# Altium PCB GPSDO_FRONT_PCB.PcbDoc
Units mm, origin at the board's own origin, x right, y up, seen from the top; angles counter-clockwise.
Board outline 100 x 100 mm, 2 copper layers (Top Layer, Bottom Layer), stack 1.595 mm thick; 52 components, 34 nets, 202 pads, 199 vias.
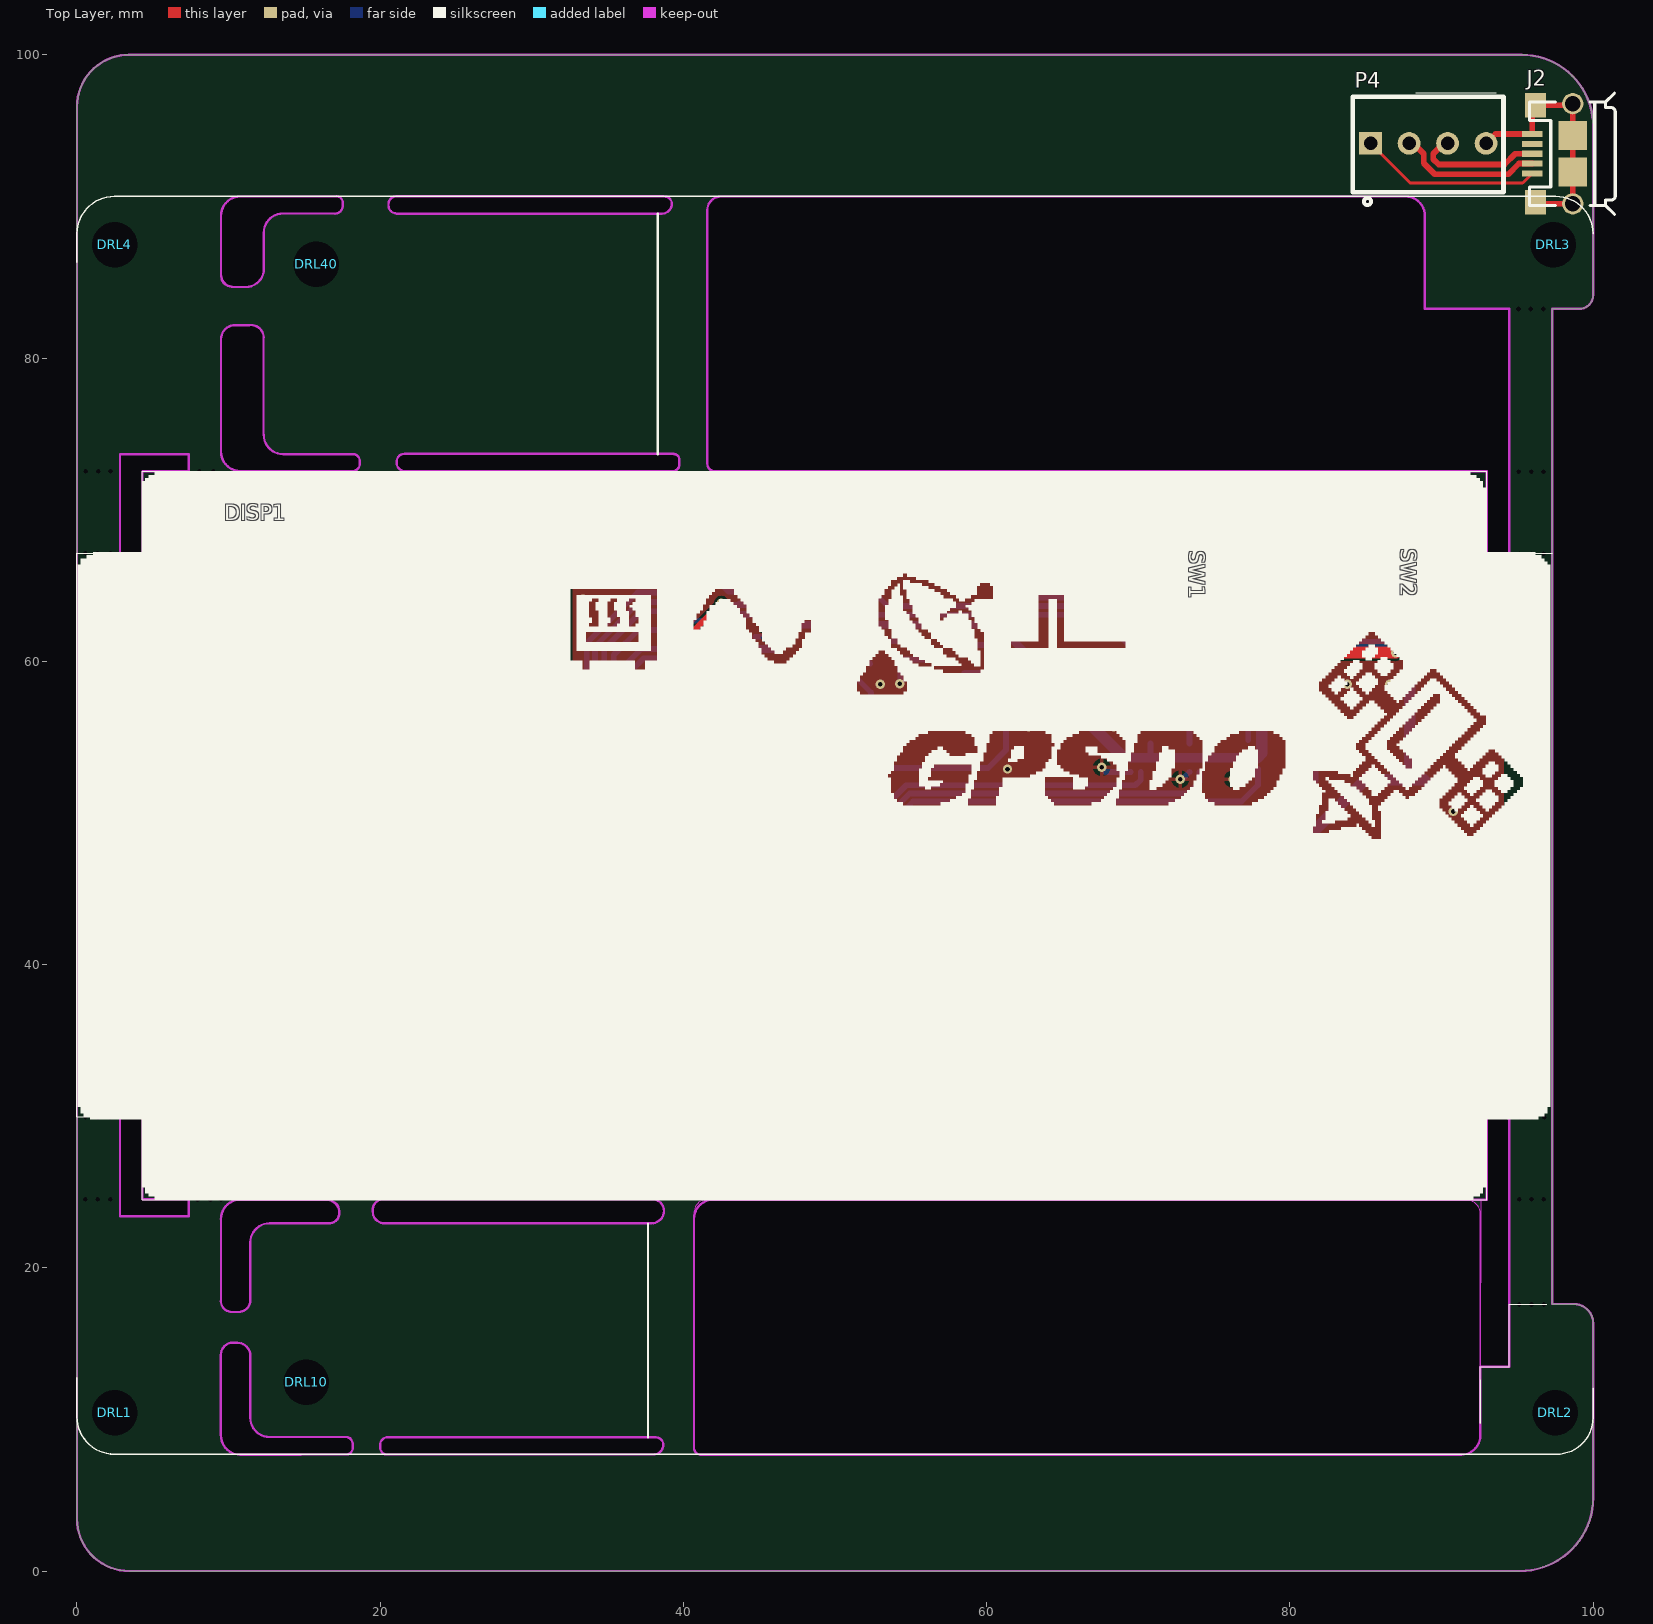
[diagram p0: Top Layer view]
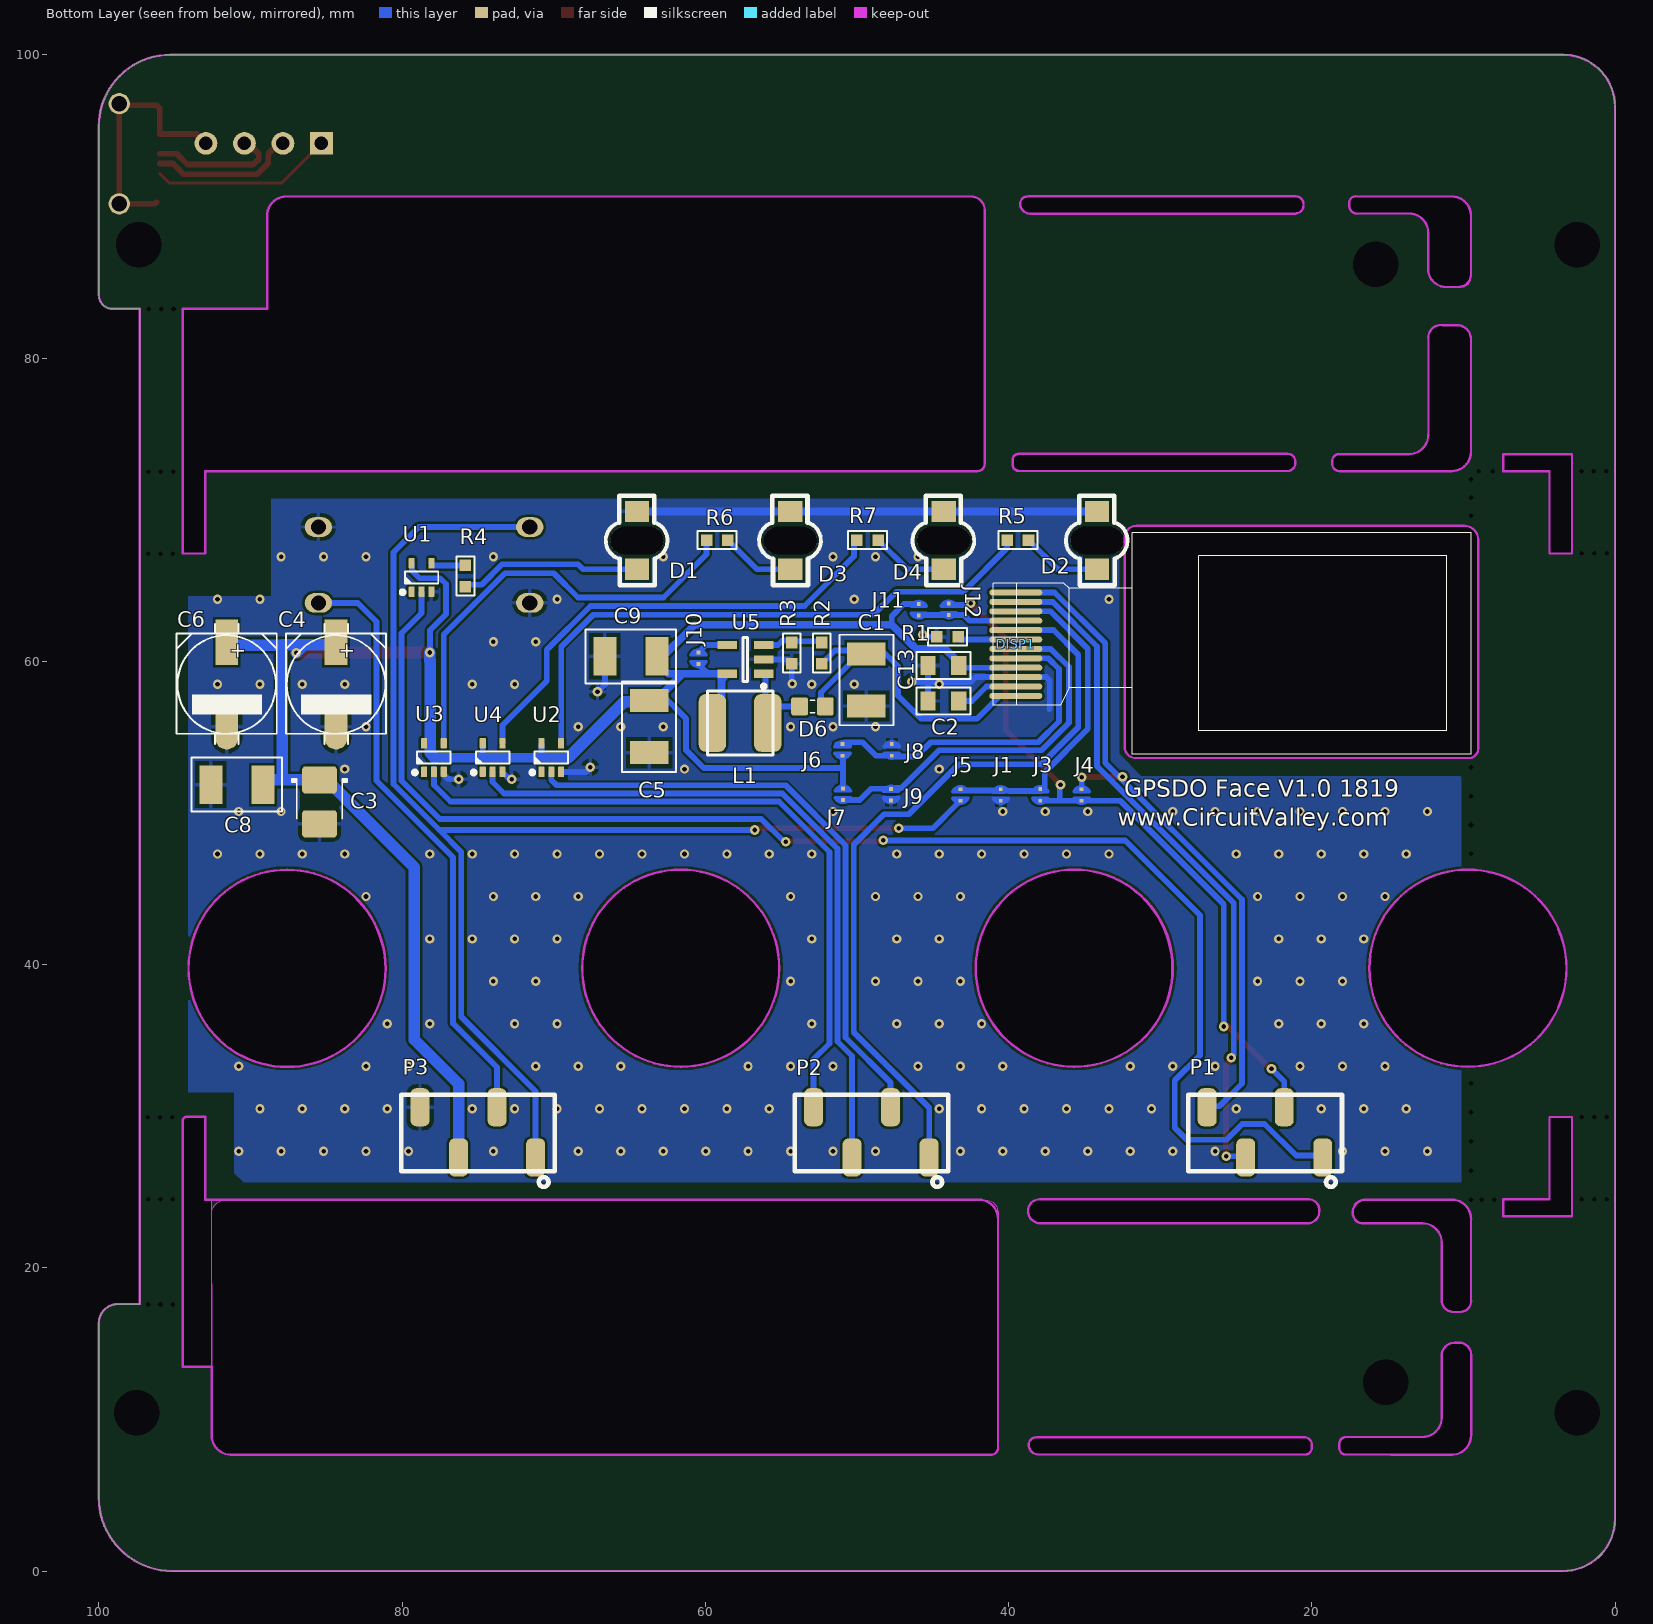
[diagram p1: Bottom Layer view, seen from below]
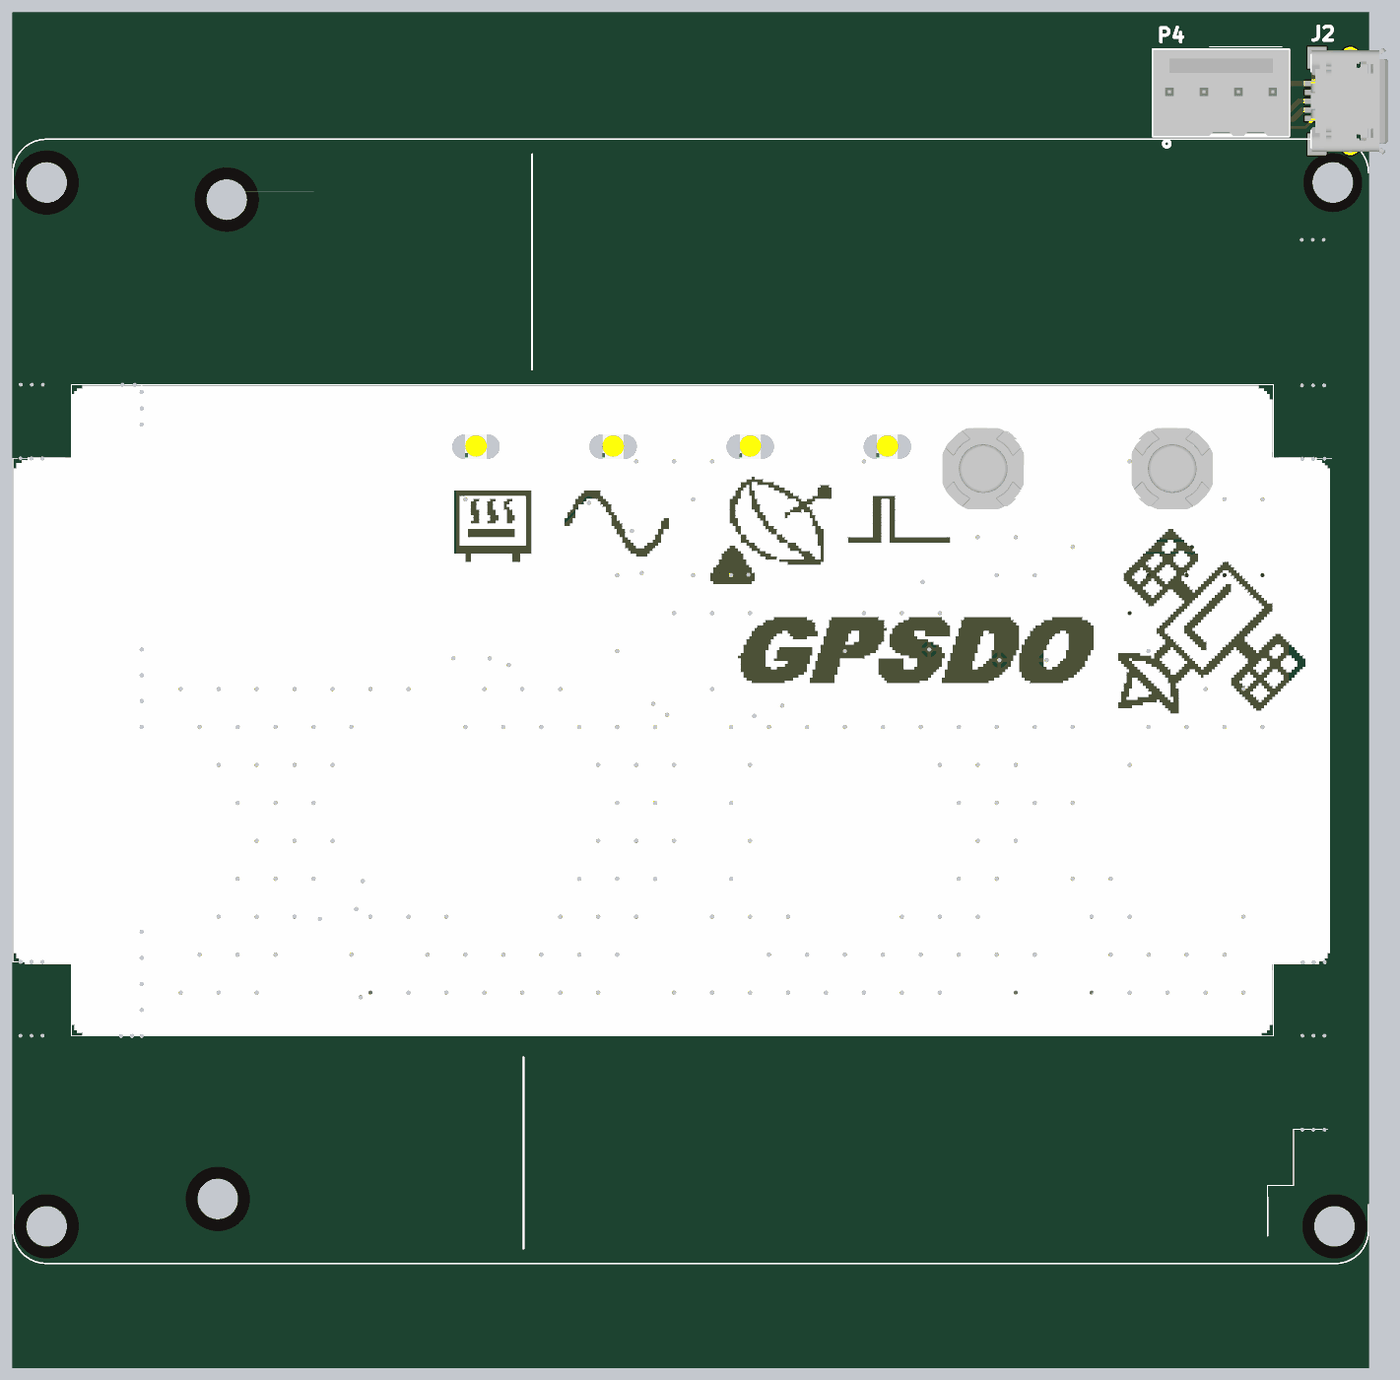
[diagram p2: 3D render of the assembled board from above, using the file's embedded part models]

## Layer stack, top to bottom
Top Solder: solder mask 0.0102, Solder Resist, Dk 3.5
Top Layer: signal copper 0.0356
Dielectric 1: dielectric 1.524, FR-4, Dk 4.8
Bottom Layer: signal copper 0.0356
Bottom Solder: solder mask 0.0102, Solder Resist, Dk 3.5

## Board outline
0,3.439 ccw(c3.439,3.439) 3.439,0 95.17,0 ccw(c95.17,4.83) 100,4.83 100,16.339 ccw(c98.73,16.339) 98.73,17.609 97.307,17.609 97.307,83.242 99.085,83.242 ccw(c99.085,84.157) 100,84.157 100,95.288 ccw(c95.288,95.288) 95.288,100 3.423,100 ccw(c3.423,96.577) 0,96.577
cut-out: 4.318,29.947 2.845,29.947 2.845,23.4 7.366,23.4 7.366,24.517 4.318,24.517
cut-out: 4.318,67.113 2.845,67.113 2.845,73.66 7.366,73.66 7.366,72.542 4.318,72.542
cut-out: 20.371,22.936 cw(c20.371,23.8) 19.507,23.8 cw(c20.199,23.8) 20.199,24.492 37.992,24.492 cw(c37.992,23.774) 38.71,23.774 38.71,23.749 cw(c37.897,23.749) 37.897,22.936
cut-out: 11.43,14.199 ccw(c10.566,14.199) 10.566,15.062 10.389,15.062 ccw(c10.389,14.173) 9.5,14.173 9.5,8.941 ccw(c10.77,8.941) 10.77,7.671 17.653,7.671 ccw(c17.653,8.204) 18.186,8.204 18.186,8.509 ccw(c17.856,8.509) 17.856,8.839 12.7,8.839 cw(c12.7,10.109) 11.43,10.109
cut-out: 11.43,17.856 cw(c10.668,17.856) 10.668,17.094 10.211,17.094 cw(c10.211,17.805) 9.5,17.805 9.5,23.222 cw(c10.77,23.222) 10.77,24.492 16.605,24.492 cw(c16.605,23.8) 17.297,23.8 17.297,23.444 cw(c16.789,23.444) 16.789,22.936 12.7,22.936 ccw(c12.7,21.666) 11.43,21.666
cut-out: 41.58,89.764 cw(c42.469,89.764) 42.469,90.653 87.605,90.653 cw(c87.605,89.357) 88.9,89.357 88.9,83.242 94.463,83.242 94.463,67.113 92.989,67.113 92.989,72.549 42.056,72.549 cw(c42.056,73.025) 41.58,73.025
cut-out: 40.691,8.153 ccw(c41.173,8.153) 41.173,7.671 91.288,7.671 ccw(c91.288,8.941) 92.558,8.941 92.558,23.571 ccw(c91.669,23.571) 91.669,24.46 41.504,24.46 ccw(c41.504,23.647) 40.691,23.647
cut-out: 9.5,81.229 cw(c10.439,81.229) 10.439,82.169 11.379,82.169 cw(c11.379,81.229) 12.319,81.229 12.319,74.93 ccw(c13.589,74.93) 13.589,73.66 15.418,73.66 cw(c15.418,73.635) 15.443,73.635 cw(c15.469,73.635) 15.469,73.66 18.186,73.66 cw(c18.186,73.177) 18.669,73.177 18.669,73.152 cw(c18.066,73.152) 18.066,72.549 10.77,72.549 cw(c10.77,73.819) 9.5,73.819
cut-out: 20.498,8.814 ccw(c20.498,8.306) 19.99,8.306 19.99,8.23 ccw(c20.523,8.23) 20.523,7.696 38.024,7.696 ccw(c38.024,8.331) 38.659,8.331 ccw(c38.176,8.331) 38.176,8.814
cut-out: 21.603,73.673 ccw(c21.603,73.165) 21.095,73.165 21.095,73.088 ccw(c21.628,73.088) 21.628,72.555 39.129,72.555 ccw(c39.129,73.19) 39.764,73.19 ccw(c39.281,73.19) 39.281,73.673
cut-out: 21.057,90.653 ccw(c21.057,90.145) 20.549,90.145 20.549,90.068 ccw(c21.082,90.068) 21.082,89.535 38.583,89.535 ccw(c38.583,90.17) 39.218,90.17 ccw(c38.735,90.17) 38.735,90.653
cut-out: 9.474,88.976 9.474,89.357 cw(c10.77,89.357) 10.77,90.653 17.12,90.653 cw(c17.12,90.246) 17.526,90.246 17.526,90.043 cw(c17.018,90.043) 17.018,89.535 13.589,89.535 ccw(c13.589,88.265) 12.319,88.265 12.319,85.877 cw(c11.125,85.877) 11.125,84.684 10.16,84.684 cw(c10.16,85.344) 9.5,85.344
cut-out: 87.645,46.218 cw(c87.645,39.741) 94.122,39.741 cw(c87.594,39.741) 87.594,33.213 cw(c87.594,39.69) 81.117,39.69 cw(c87.645,39.69)
cut-out: 61.61,46.243 cw(c61.61,39.766) 68.087,39.766 cw(c61.559,39.766) 61.559,33.238 cw(c61.559,39.715) 55.082,39.715 cw(c61.61,39.715)
cut-out: 35.753,46.243 cw(c35.753,39.766) 42.23,39.766 cw(c35.702,39.766) 35.702,33.238 cw(c35.702,39.715) 29.225,39.715 cw(c35.753,39.715)
cut-out: 9.743,46.254 cw(c9.743,39.777) 16.22,39.777 cw(c9.693,39.777) 9.693,33.249 cw(c9.692,39.726) 3.215,39.726 cw(c9.743,39.726)
cut-out: 92.558,13.468 94.463,13.468 94.463,29.699 ccw(c94.209,29.699) 94.209,29.953 92.989,29.953 92.989,24.492 92.583,24.492 92.583,24.494
cut-out: 32.334,68.097 ccw(c31.547,68.148) 31.598,68.936 9.931,68.936 ccw(c9.93,68.048) 9.042,68.047 9.042,54.229 ccw(c9.652,54.229) 9.652,53.619 31.598,53.619 ccw(c31.585,54.369) 32.334,54.381

## Design rules (kind name [scope] priority, off if disabled: settings)
Clearance [All] p1: gap=0.152
DiffPairsRouting [All] p1: maxlimit=0.254 minlimit=0.254 mostfreqgap=0.254 toplayer_minwidth=0.381 toplayer_maxwidth=0.381 toplayer_prefwidth=0.381 bottomlayer_minwidth=0.381 bottomlayer_maxwidth=0.381 bottomlayer_prefwidth=0.381 maxuncoupledlength=12.7
PolygonConnect [All] p1: connectstyle=Relief reliefconductorwidth=0.254 reliefentries=4 polygonreliefangle="90 Angle" airgapwidth=0.254
RoutingVias [All] p1: holewidth=0.305 width=0.635 viastyle="Through Hole" minholewidth=0.305 minwidth=0.635 maxholewidth=12.7 maxwidth=12.7
SolderMaskExpansion [All] p1: expansion=0.102
Width [All] p1: maxlimit=7.62 minlimit=0.152 preferedwidth=0.254
29 further rules are at their usual default settings.

## Classes and differential pairs
component class GPSDO_FRONT: C1 C2 C3 C4 C5 C6 C8 C9 C13 D1 D2 D3 D4 D6 DISP1 J1 J2 J3 J4 J5 J6 J7 J8 J9 J10 J11 J12 L1 P1 P2 P3 P4 R1 R2 R3 R4 R5 R6 R7 SW1 SW2 U1 U2 U3 U4 U5
differential pair USB: +USB_P -USB_N

## Components (designator, comment, footprint, x,y, rotation, side; value= is the part's Value field where it differs from the comment)
C1 "10uf" 1210C-GENERIC 49.378,57.048 r90 bottom
C2 "TBD" 0805C-TBD 45.06,57.379 r180 bottom
C3 "10uf" CAPMP3528X210N 85.446,50.724 r270 bottom
C4 "100uF-25V" PANACAP-D-GENERIC 84.353,58.471 r270 bottom
C5 "10uf" 1210C-GENERIC 63.703,53.975 r90 bottom
C6 "100uF-25V" PANACAP-D-GENERIC 91.567,58.471 r270 bottom
C8 "10uf" 1210C-GENERIC 92.608,51.867 r180 bottom
C9 "10uf" 1210C-GENERIC 66.624,60.325 r180 bottom
C13 "TBD" 0805C-TBD 45.06,59.715 r180 bottom
D1 "KPTL-3216SURCK-01" KPTL-3216SURCK-01 64.508,67.97 r90 bottom
D2 "KPTL-3216SURCK-01" KPTL-3216SURCK-01 34.163,67.97 r90 bottom
D3 "KPTL-3216SURCK-01" KPTL-3216SURCK-01 54.393,67.97 r90 bottom
D4 "KPTL-3216SURCK-01" KPTL-3216SURCK-01 44.278,67.97 r90 bottom
D6 "" Diode_0603 52.934,57.023 r180 bottom
DISP1 "OLED" "OLED QT1107P05C" 27.457,61.17 r0 top locked
DRL1 "MOUNT 2.7x6.2Mask" NO_COPPER_NOMASK_2m75_6m2#1 2.703,10.446 r0 top
DRL2 "MOUNT 2.7x6.2Mask" NO_COPPER_NOMASK_2m75_6m2#2 97.283,10.446 r0 top
DRL3 "MOUNT 2.7x6.2Mask" NO_COPPER_NOMASK_2m75_6m2#3 97.102,87.459 r0 top
DRL4 "MOUNT 2.7x6.2Mask" NO_COPPER_NOMASK_2m75_6m2#4 3.31,87.846 r0 top
DRL10 "MOUNT 2.7x6.2Mask" NO_COPPER_NOMASK_2m75_6m2#1 14.899,12.465 r180 top (schematic designator DRL1)
DRL40 "MOUNT 2.7x6.2Mask" NO_COPPER_NOMASK_2m75_6m2#4 14.953,85.814 r180 top (schematic designator DRL4)
J1 "BYPASS-MINI-CLOSED" BYPASS-MINI-CLOSED#1 40.513,50.317 r90 bottom
J2 "Micro-USB-B" 10118193-0001lfc 98.654,93.472 r90 top
J3 "BYPASS-MINI-CLOSED" BYPASS-MINI-CLOSED#2 37.914,52.049 r270 bottom
J4 "BYPASS-MINI-CLOSED" BYPASS-MINI-CLOSED#3 35.179,50.317 r90 bottom
J5 "BYPASS-MINI-CLOSED" BYPASS-MINI-CLOSED#2 43.18,52.045 r270 bottom
J6 "BYPASS-MINI-CLOSED" BYPASS-MINI-CLOSED#4 50.952,55.016 r270 bottom
J7 "BYPASS-MINI-CLOSED" BYPASS-MINI-CLOSED#5 50.927,50.368 r90 bottom
J8 "BYPASS-MINI-CLOSED" BYPASS-MINI-CLOSED#6 47.701,55.016 r270 bottom
J9 "BYPASS-MINI-CLOSED" BYPASS-MINI-CLOSED#7 47.752,50.343 r90 bottom
J10 "BYPASS-MINI-CLOSED" BYPASS-MINI-CLOSED#8 60.452,61.062 r270 bottom
J11 "BYPASS-MINI-CLOSED" BYPASS-MINI-CLOSED#2 45.923,62.535 r90 bottom
J12 "BYPASS-MINI-CLOSED" BYPASS-MINI-CLOSED#5 43.942,64.287 r270 bottom
L1 "Inductor" IFSC-1515AH-01 57.683,55.931 r180 bottom
P1 "Header 4" "M20-8770446 4PIN" 23.089,28.931 r0 bottom
P2 "Header 4" "M20-8770446 4PIN" 49.047,28.931 r0 bottom
P3 "Header 4" "M20-8770446 4PIN" 75.006,28.931 r0 bottom
P4 "Header 4" 22-23-2041 89.129,94.158 r0 top
R1 "0603R-000" 0603R-GENERIC 44.729,61.62 r180 bottom
R2 "0603R-000" 0603R-GENERIC 52.324,61.239 r270 bottom
R3 "0603R-000" 0603R-GENERIC 54.305,59.842 r90 bottom
R4 "0603R-000" 0603R-GENERIC 75.819,64.922 r90 bottom
R5 "0603R-000" 0603R-GENERIC 38.684,67.996 r0 bottom
R6 "0603R-000" 0603R-GENERIC 58.522,67.996 r0 bottom
R7 "0603R-000" 0603R-GENERIC 48.603,67.996 r0 bottom
SW1 "PushButton" EVQ-11A04R 71.577,66.351 r270 top
SW2 "PushButton" EVQ-11A04R 85.522,66.351 r90 top locked
U1 "74LVC1G17GW" SC70-5 78.715,65.532 r90 bottom
U2 "74LVC1G17GW" SC70-5 70.155,53.645 r90 bottom
U3 "74LVC1G17GW" SC70-5 77.902,53.645 r90 bottom
U4 "74LVC1G17GW" SC70-5 74.028,53.645 r90 bottom
U5 "LT1615ES5" LT-S5-5-TSOT-23_N 57.353,60.122 r0 bottom

## Footprints (in the part's own frame and the unit in brackets; to place one, negate y for a bottom-side part, rotate by r counter-clockwise, add the part's x,y. Pads: shape width x height; smd on the part's side, far side on the other; paste and mask are expansions set on the pad)
22-23-2041 [mm]
  rect 1.5x1.5 hole 0.9: 1(-3.81,0)
  round 1.5 hole 0.9: 2(-1.27,0) 3(1.27,0) 4(3.81,0)
  silkscreen extent -4.98,-4.07 4.95,3.07, body extent -5,-3.25 5,3.1, height 10.68
0603R-GENERIC [mil] "RESISTOR 0603"
  rect 30x30 smd: 1(0,0) 2(55,0)
  silkscreen extent -23,-23 78,23, body extent -4,-15 59,15, height 19
0805C-TBD [mil] "CAPACITOR 0805"
  rect 40x50 smd: 1(-10,0) 2(70,0)
  silkscreen extent -40,-35 100,35, body extent -11,-25 70,25, height 26
1210C-GENERIC [mil]
  rect 60x100 smd: 1(0,0) 2(135,0)
  silkscreen extent -50,-70 185,70, body extent -10,-50 145,50, height 46
10118193-0001lfc [mm]
  rect 0.4x1.35 smd: 1(-1.3,2.675) 2(-0.65,2.675) 3(0,2.675) 4(0.65,2.675) 5(1.3,2.675)
  round 1.4 hole 1: 6(-3.3,0) 9(3.3,0)
  rect 1.6x1.4 smd: 6(-3.2,2.45) 9(3.2,2.45)
  rect 1.9x1.9 smd: 7(-1.2,0) 8(1.2,0)
  silkscreen extent -4,-2.8 4,2.85, body extent -3.93,-2.76 3.93,2.9, height 2.81
BYPASS-MINI-CLOSED#1 [mil] "SOLDERDOT BYPASS"
  rect 10x10 smd paste-300: 1(19,0)
  rect 10x10 smd paste-30: 2(49,0)
  Top Layer region: 25,18 23,18 13,8 13,-9 22,-18 25,-18
  Top Layer region: 43,18 45,18 55,8 55,-9 46,-18 43,-18
  Top Layer lines w8: 25.83,-20.43 cw(c34,0) 25.83,20.43 25.83,-20.43 ; 42.17,-20.43 ccw(c34,0) 43.67,-19.76 ccw(c34,0) 47,-17.75 ccw(c34,0) 42.17,20.43 42.17,6 42.17,0 42.17,-20.43
  body extent 15,-20 55,20, height 25
BYPASS-MINI-CLOSED#2 [mil] "SOLDERDOT BYPASS"
  rect 10x10 smd paste-300: 1(19,0)
  rect 10x10 smd paste-30: 2(49,0)
  Top Layer region: 25,18 23,18 13,8 13,-9 22,-18 25,-18
  Top Layer region: 43,18 45,18 55,8 55,-9 46,-18 43,-18
  Top Layer lines w8: 42.17,20.43 cw(c34,0) 48,16.97 cw(c34,0) 49.17,15.93 cw(c34,0) 42.17,-20.43 42.17,0 42.17,20.43 ; 25.83,20.43 ccw(c34,0) 15.28,11.56 ccw(c34,0) 12.87,6.13 ccw(c34,0) 19,-16.09 ccw(c34,0) 23.67,-19.42 ccw(c34,0) 25.83,-20.43 25.83,0 25.83,20.43
  body extent 15,-20 55,20, height 25
BYPASS-MINI-CLOSED#3 [mil] "SOLDERDOT BYPASS"
  rect 10x10 smd paste-300: 1(19,0)
  rect 10x10 smd paste-30: 2(49,0)
  Top Layer region: 25,18 23,18 13,8 13,-9 22,-18 25,-18
  Top Layer region: 43,18 45,18 55,8 55,-9 46,-18 43,-18
  Top Layer lines w8: 25.83,-20.43 cw(c34,0) 19,-16.09 cw(c34,0) 19,16.09 cw(c34,0) 25.83,20.43 25.83,0 25.83,-20.43 ; 42.17,-20.43 ccw(c34,0) 56,0 ccw(c34,0) 42.17,20.43 42.17,0 42.17,-20.43
  body extent 15,-20 55,20, height 25
BYPASS-MINI-CLOSED#4 [mil] "SOLDERDOT BYPASS"
  rect 10x10 smd paste-300: 1(19,0)
  rect 10x10 smd paste-30: 2(49,0)
  Top Layer region: 25,18 23,18 13,8 13,-9 22,-18 25,-18
  Top Layer region: 43,18 45,18 55,8 55,-9 46,-18 43,-18
  Top Layer lines w8: 42.17,20.43 cw(c34,0) 56,0 cw(c34,0) 42.17,-20.43 42.17,0 42.17,20.43 ; 25.83,20.43 ccw(c34,0) 21,17.75 ccw(c34,0) 20,16.97 ccw(c34,0) 19,16.09 ccw(c34,0) 14,9.17 ccw(c34,0) 12.01,-0.52 ccw(c34,0) 19,-16.09 ccw(c34,0) 25.83,-20.43 25.83,-16.09 25.83,0 25.83,20.43
  body extent 15,-20 55,20, height 25
BYPASS-MINI-CLOSED#5 [mil] "SOLDERDOT BYPASS"
  rect 10x10 smd paste-300: 1(19,0)
  rect 10x10 smd paste-30: 2(49,0)
  Top Layer region: 25,18 23,18 13,8 13,-9 22,-18 25,-18
  Top Layer region: 43,18 45,18 55,8 55,-9 46,-18 43,-18
  Top Layer lines w8: 25.83,-20.43 cw(c34,0) 19,-16.09 cw(c34,0) 13.78,-8.67 cw(c34,0) 17.55,14.6 cw(c34,0) 19.57,16.61 cw(c34,0) 19.72,16.73 cw(c34,0) 25.83,20.43 25.83,0 25.83,-4.9 25.83,-20.43 ; 42.17,-20.43 ccw(c34,0) 56,0 ccw(c34,0) 42.17,20.43 42.17,0 42.17,-20.43
  body extent 15,-20 55,20, height 25
BYPASS-MINI-CLOSED#6 [mil] "SOLDERDOT BYPASS"
  rect 10x10 smd paste-300: 1(19,0)
  rect 10x10 smd paste-30: 2(49,0)
  Top Layer region: 25,18 23,18 13,8 13,-9 22,-18 25,-18
  Top Layer region: 43,18 45,18 55,8 55,-9 46,-18 43,-18
  Top Layer lines w8: 42.17,20.43 cw(c34,0) 47,17.75 cw(c34,0) 49,16.09 cw(c34,0) 51,13.96 cw(c34,0) 54,9.17 cw(c34,0) 54.22,-8.67 cw(c34,0) 54,-9.17 cw(c34,0) 49,-16.09 cw(c34,0) 47,-17.75 cw(c34,0) 42.17,-20.43 42.17,0 42.17,16.09 42.17,20.43 ; 25.83,20.43 ccw(c34,0) 25.83,-20.43 25.83,20.43
  body extent 15,-20 55,20, height 25
BYPASS-MINI-CLOSED#7 [mil] "SOLDERDOT BYPASS"
  rect 10x10 smd paste-300: 1(19,0)
  rect 10x10 smd paste-30: 2(49,0)
  Top Layer region: 25,18 23,18 13,8 13,-9 22,-18 25,-18
  Top Layer region: 43,18 45,18 55,8 55,-9 46,-18 43,-18
  Top Layer lines w8: 25.83,-20.43 cw(c34,0) 25.83,20.43 25.83,-20.43 ; 42.17,-20.43 ccw(c34,0) 51.03,-13.93 ccw(c34,0) 51.28,-13.61 ccw(c34,0) 55.13,6.13 ccw(c34,0) 51.03,13.93 ccw(c34,0) 49,16.09 ccw(c34,0) 42.17,20.43 42.17,0 42.17,-7.15 42.17,-13.93 42.17,-20.43
  body extent 15,-20 55,20, height 25
BYPASS-MINI-CLOSED#8 [mil] "SOLDERDOT BYPASS"
  rect 10x10 smd paste-300: 1(19,0)
  rect 10x10 smd paste-30: 2(49,0)
  Top Layer region: 25,18 23,18 13,8 13,-9 22,-18 25,-18
  Top Layer region: 43,18 45,18 55,8 55,-9 46,-18 43,-18
  Top Layer lines w8: 42.17,20.43 cw(c34,0) 55.13,6.13 cw(c34,0) 42.17,-20.43 42.17,0 42.17,20.43 ; 25.83,20.43 ccw(c34,0) 12.87,6.13 ccw(c34,0) 25.83,-20.43 25.83,0 25.83,20.43
  body extent 15,-20 55,20, height 25
CAPMP3528X210N [mm] "Molded body capacitor, Body 3.5x2.8mm, 1210, IPC Nominal settings"
  round 0.254 on Mech14: 0(0,0)
  rrect25% 1.8x2.3 smd: 1(-1.45,0) 2(1.45,0)
  Top Layer pour cut-out: -0.508,1.27 0.508,1.27 0.508,-1.27 -0.508,-1.27
  silkscreen extent -1.5,-1.8 1.1,1.8, body extent -1.75,-1.4 1.75,1.4, height 2.1
Diode_0603 [mm] "SD0603S040S0R2"
  round 0.254 on Mech14: 0(0,0)
  rrect25% 1.1x1.2 smd: 1(-0.85,0) 2(0.85,0)
  Top Layer pour cut-out: -0.4,0.6 0.4,0.6 0.4,-0.6 -0.4,-0.6
  silkscreen extent -0.15,-0.41 0.15,0.41, body extent -0.82,-0.43 0.88,0.37, height 0.57
EVQ-11A04R [mm] "Panasonic EVQ-11"
  oval 1.3x1.8 hole 1: 1(-2.5,0) 2(2.5,0)
  body extent -3,-3 3,3, height 5.59
IFSC-1515AH-01 [mm] "Vishay Dale Low Profile, High Current Inductors"
  rrect50% 1.8x3.8 smd: 1(-1.85,0) 2(1.8,0)
  silkscreen extent -2.16,-2.11 2.16,2.11, body extent -1.97,-1.95 1.98,2, height 1.65
KPTL-3216SURCK-01 [mm]
  oval 1.8x3.5 hole 1.8 slot 3.5 at 90 deg unplated: 3(0,0)
  rect 1.4x1.6 smd: A(-1.905,0) K(1.905,0)
  silkscreen extent -2.95,-2.01 2.95,2.06, body extent -1.55,-0.8 1.65,0.8, height 0.26
LT-S5-5-TSOT-23_N [mm] "SOT23, 5-Leads, Body 2.90x1.63mm, Pitch 0.95mm, IPC Medium Density"
  rect 1.3x0.55 smd: 1(-1.2,0.95) 2(-1.2,0) 3(-1.2,-0.95) 4(1.2,-0.95) 5(1.2,0.95)
  silkscreen extent -1.32,-1.45 0.15,1.9, body extent -0.87,-1.45 0.87,1.45, height 1
"M20-8770446 4PIN" [mm] "harwin M20-8770446 4PIN"
  rrect60% 1.25x2.51 smd: 1(-3.81,1.655) 2(-1.27,-1.655) 3(1.27,1.655) 4(3.81,-1.655)
  silkscreen extent -5.08,-2.49 5.05,3.59, body extent -5.08,-2.49 5.08,2.59, height 9.94
NO_COPPER_NOMASK_2m75_6m2#1 [mm]
  round 5 on Keep-Out: 0(-0.214,0)
  round 2.75 hole 3 unplated mask+1: D2m7(-0.214,0)
NO_COPPER_NOMASK_2m75_6m2#2 [mm]
  round 5 on Keep-Out: 0(0.206,0)
  round 2.75 hole 3 unplated mask+1: D2m7(0.206,0)
NO_COPPER_NOMASK_2m75_6m2#3 [mm]
  round 3.4 on Keep-Out: 0(0.262,0)
  round 2.75 hole 3 unplated mask+0.8: D2m7(0.262,0)
NO_COPPER_NOMASK_2m75_6m2#4 [mm]
  round 5 on Keep-Out: 0(-0.821,-0.386)
  round 2.75 hole 3 unplated mask+1: D2m7(-0.821,-0.386)
"OLED QT1107P05C" [mm] "OLED QT1107P05C  0.73inch 88x128 , flat mount"
  oval 3.5x0.4 smd far side: 1(12.065,-3.454) 2(12.065,-2.834) 3(12.065,-2.214) 4(12.065,-1.594) 5(12.065,-0.974) 6(12.065,-0.354) 7(12.065,0.266) 8(12.065,0.886) 9(12.065,1.506) 10(12.065,2.126) 11(12.065,2.746) 12(12.065,3.366)
  body extent -17.96,-7.29 13.54,7.32, height 0.1
PANACAP-D-GENERIC [mm]
  rect 3x1.5 smd: +(-2.794,0)
  oval 3x1.5 smd: -(2.794,0)
  silkscreen extent -4,-3.3 3.93,3.3, body extent -3.5,-3.3 3.5,3.3, height 5.4
SC70-5 [mm]
  round 0.254 on Mech14: 0(0,0)
  rrect25% 0.7x0.4 smd: 1(-0.94,0.65) 2(-0.94,0) 3(-0.94,-0.65) 4(0.94,-0.65) 5(0.94,0.65)
  silkscreen extent -1.1,-1.1 0.4,1.38, body extent -1.06,-1 1.04,1, height 0.95

## Part data
C1 C5 C8 C9: library part 1210C-2u2-35V, "GENERIC CAPACITOR NON POLARISED 1210"
C2 C13: library part 0805C-TBD, "CAPACITOR 0805 CERAMIC VALUE TO BE DETERMINED"
C3: library part CAPT_47u_1210_6V3, "Capacitor SMD Tantalum 47uF 20% 6.3V 1210"
C4 C6: library part PANACAP-100UF-16V-FK, "GENERIC CAPACITOR POLARISED"
D6: library part Schottky_diode
DISP1: library part "OLED QT1107P05C"
DRL1 DRL2 DRL3 DRL4 DRL10 DRL40: library part DRILL_2.7x6.2Mask_NOCOPPER
J1 J3 J4 J5 J6 J7 J8 J9 J10 J11 J12: "SOLDERDOT BYPASS"
L1: library part inductor_smd
P1 P2 P3 P4: "Header, 4-Pin"
R1 R2 R3 R4 R5 R6 R7: "GENERIC RESISTOR 0603"
U1 U2 U3 U4: library part 74LVC1G17GW-Q100
U5: "Micropower Step-Up DC/DC Converter, 5-pin SOT23 (S5-5), -40 to 85 degC"

## Free pads (board coordinates)
  round 0 hole 0.305 unplated: 0(2.184,24.511) 0(2.184,29.947) 0(2.184,67.113) 0(2.21,72.542) 0(9.5,24.486) 0(9.5,30.258) 0(9.5,32.182) 0(9.5,51.105) 0(9.5,70.79) 0(96.698,83.236) 0(96.723,72.492) 0(96.749,17.577) 0(96.749,24.511) 0(96.749,67.081) 0(96.774,29.921) 1(0.559,24.511) 1(0.559,29.947) 1(0.559,67.113) 1(0.584,72.542) 1(7.976,24.486) 1(8.077,72.542) 1(9.5,28.334) 1(9.5,47.295) 1(9.5,49.2) 1(9.5,69.596) 1(9.5,72.009) 1(95.072,83.236) 1(95.098,72.492) 1(95.123,17.577) 1(95.123,24.511) 1(95.123,67.081) 1(95.148,29.921) 2(1.372,24.511) 2(1.372,29.947) 2(1.372,67.113) 2(1.397,72.542) 2(8.788,24.486) 2(8.992,72.542) 2(9.5,26.41) 2(9.5,53.01) 2(95.885,83.236) 2(95.91,72.492) 2(95.936,17.577) 2(95.936,24.511) 2(95.936,67.081) 2(95.961,29.921)

## Via types
v1: diameter 0.61, hole 0.305, Top Layer to Bottom Layer, tented both sides, 178 vias
v2: diameter 0.635, hole 0.305, Top Layer to Bottom Layer, tented both sides, 21 vias

## Nets (pads, with @x,y where several pads share a name; then routed paths per layer and width w, separated by ;. In a path a pad name is that pad's centre, name@x,y a point inside that pad or via, vN(x,y) a via of type N, cw(c..) or ccw(c..) an arc to the next point about the centre after c; other vN are vias at no path point)
3V3: C3.1 C4.+ C5.2 C6.+ C8.2 C9.2 C13.2 DISP1.4 J6.2 J7.2 J10.2 J11.2 L1.1 P3.3 U1.5 U2.5 U3.5 U4.5 U5.5 | length 149.7
  Top Layer w0.762: v2(78.181,60.579) 86.944,60.579 v2(86.97,60.554)
  Bottom Layer w0.381: DISP1.4 43.141,59.575 C13.2 ; J11.2 46.332,63.779 46.888,63.779 47.701,62.967 47.701,62.408 ; J7.2 50.927,51.791 J6.2@50.927,53.746 ; 50.927,52.959 60.096,52.959 61.265,54.127 61.265,56.21 C5.2@62.865,57.81 ; 59.807,59.172 60.296,59.661 J10.2 ; 70.764,53.645 70.805,53.685 U2.5 ; 74.651,53.645 74.678,53.672 U4.5 ; 78.156,60.02 78.156,62.052 77.102,63.106 77.102,65.087 77.495,65.481 78.842,65.481 79.365,66.004 U1.5
  Bottom Layer w0.508: C13.2 43.282,59.919 44.171,60.808 46.101,60.808 47.701,62.408 60.706,62.408 63.195,59.919 62.448,59.172 61.504,59.172 ; L1.1@58.93,56.134 58.93,58.795 U5.5 59.807,59.172 61.504,59.172 ; C5.2@62.865,57.81 61.504,59.172
  Bottom Layer w0.635: 69.037,53.645 70.764,53.645 74.651,53.645 77.851,53.645
  Bottom Layer w0.762: C5.2@62.713,57.328 65.354,57.328 69.037,53.645 ; P3.3 76.276,32.131 79.197,35.052 79.197,46.406 C3.1@85.205,52.414 ; 77.851,53.645 78.156,53.95 78.156,60.02 78.181,60.046 v2(78.181,60.579) ; C4.+ 84.531,61.087 86.614,61.087 ; C3.1 87.909,52.174 ; v2(86.97,60.554) 86.614,60.909 86.614,61.087 ; C8.2 88.872,52.174 87.909,52.174 ; C6.+@91.592,61.163 91.491,61.062 87.935,61.062 87.909,61.087 ; 86.614,61.087 87.909,61.087 ; 87.909,52.174 87.909,61.087
A0: DISP1.10 J1.2 J3.1 J5.1 | length 22.1
  Bottom Layer w0.381: DISP1.10 37.235,63.295 34.773,60.833 34.773,55.524 37.62,52.677 37.62,51.661 37.833,51.448 38.407,51.448 39.982,51.448 39.991,51.456 40.269,51.456 40.277,51.448 41.02,51.448 41.054,51.482 43.003,51.482 43.012,51.473 43.536,51.473
ANT: P2.3 U4.2 | length 46
  Bottom Layer w0.381: P2.3 50.317,33.96 51.283,34.925 51.283,47.643 54.922,51.283 73.279,51.283 74.041,52.045 74.028,52.057 U4.2
GND: C1.1 C2.1 C3.2 C4.- C5.1 C6.- C8.1 C9.1 C13.1 D1.K D2.K D3.K D4.K DISP1.3 J1.1 J8.1 J9.1 P3.4 R1.1 R3.1 SW1.2 SW2.2 U1.3 U2.3 U3.3 U4.3 U5.2 | length 54.8
  Bottom Layer w0.381: 37.313,56.845 37.287,56.871 37.287,58.725 37.518,58.955 DISP1.3 42.188,58.955 42.52,58.623 45.263,58.623 ; R1.1 45.542,61.62 v2(45.669,61.747) ; C2.1@45.288,57.379 45.314,57.404 45.314,58.623 ; C13.1 45.314,58.623 ; v2(46.38,58.649) 46.355,58.623 45.314,58.623 ; v2(54.254,58.522) 54.305,58.572 R3.1 ; R3.1@54.305,59.919 54.508,60.122 U5.2 ; C9.1 66.624,58.471 v2(67.107,57.988) ; v2(67.589,53.01) 67.589,52.959 67.844,52.705 U2.3 ; v2(72.771,52.222) 72.896,52.222 U4.3 ; v2(76.251,52.222) 76.769,52.222 ccw(c76.769,52.705) U3.3
  Bottom Layer w0.508: D2.K D4.K D3.K D1.K
  other v1: 12.377,27.688 15.177,27.688 17.977,27.688 26.377,27.688 29.177,27.688 31.977,27.688 34.777,27.688 37.577,27.688 40.377,27.688 43.177,27.688 48.777,27.688 51.577,27.688 54.377,27.688 57.177,27.688 59.977,27.688 62.777,27.688 65.577,27.688 68.377,27.688 73.977,27.688 79.577,27.688 82.377,27.688 85.177,27.688 87.977,27.688 90.777,27.688 13.777,30.488 16.577,30.488 19.377,30.488 24.977,30.488 30.577,30.488 33.377,30.488 36.177,30.488 38.977,30.488 41.777,30.488 44.577,30.488 55.777,30.488 58.577,30.488 61.377,30.488 64.177,30.488 66.977,30.488 69.777,30.488 72.577,30.488 75.377,30.488 80.977,30.488 83.777,30.488 86.577,30.488 89.377,30.488 15.177,33.288 17.977,33.288 20.777,33.288 26.377,33.288 29.177,33.288 31.977,33.288 40.377,33.288 43.177,33.288 45.977,33.288 51.577,33.288 54.377,33.288 57.177,33.288 65.577,33.288 68.377,33.288 71.177,33.288 79.577,33.288 82.377,33.288 90.777,33.288 16.577,36.088 19.377,36.088 22.177,36.088 41.777,36.088 44.577,36.088 47.377,36.088 52.977,36.088 69.777,36.088 72.577,36.088 78.177,36.088 80.977,36.088 17.977,38.888 20.777,38.888 23.577,38.888 43.177,38.888 45.977,38.888 48.777,38.888 54.377,38.888 71.177,38.888 73.977,38.888 16.577,41.688 19.377,41.688 22.177,41.688 44.577,41.688 47.377,41.688 52.977,41.688 69.777,41.688 72.577,41.688 75.377,41.688 78.177,41.688 15.177,44.488 17.977,44.488 20.777,44.488 23.577,44.488 43.177,44.488 45.977,44.488 48.777,44.488 54.377,44.488 68.377,44.488 71.177,44.488 73.977,44.488 82.377,44.488 13.777,47.288 16.577,47.288 19.377,47.288 22.177,47.288 24.977,47.288 33.377,47.288 36.177,47.288 38.977,47.288 41.777,47.288 44.577,47.288 47.377,47.288 52.977,47.288 55.777,47.288 58.577,47.288 61.377,47.288 64.177,47.288 66.977,47.288 69.777,47.288 72.577,47.288 75.377,47.288 78.177,47.288 83.777,47.288 86.577,47.288 89.377,47.288 92.177,47.288 12.377,50.088 15.177,50.088 17.977,50.088 20.777,50.088 23.577,50.088 26.377,50.088 29.177,50.088 34.777,50.088 37.577,50.088 40.377,50.088 51.577,50.088 87.977,50.088 90.777,50.088 44.577,52.888 61.377,52.888 83.777,52.888 48.777,55.688 51.577,55.688 54.377,55.688 62.777,55.688 65.577,55.688 68.377,55.688 82.377,55.688 44.577,58.488 50.177,58.488 52.977,58.488 72.577,58.488 75.377,58.488 83.777,58.488 86.577,58.488 89.377,58.488 92.177,58.488 71.177,61.288 73.977,61.288 33.377,64.088 50.177,64.088 69.777,64.088 89.377,64.088 92.177,64.088 45.977,66.888 48.777,66.888 51.577,66.888 62.777,66.888 73.977,66.888 82.377,66.888 85.177,66.888 87.977,66.888
IM0: DISP1.5 J6.1 J8.2 | length 23.1
  Bottom Layer w0.381: DISP1.5 37.386,60.195 36.678,59.487 36.678,56.032 38.049,54.661 45.136,54.661 46.076,53.721 47.347,53.721 47.65,53.721 J8.2 48.11,53.772 48.743,53.772 49.632,54.661 50.72,54.661 50.825,54.661 J6.1 ; 50.502,54.483 51.31,54.483 51.336,54.508
IM1: DISP1.6 J7.1 J9.2 | length 24.3
  Bottom Layer w0.381: DISP1.6 37.219,60.815 36.017,59.614 36.017,55.938 37.828,54.127 44.592,54.127 47.074,51.645 47.406,51.645 ; J9.2 48.161,51.587 49.073,51.587 49.809,50.851 50.518,50.851 J7.1
KEY1: J5.2 P3.1 SW1.1 | length 88.6
  Top Layer w0.381: v2(47.242,48.994) 56.517,48.994 56.642,48.87 v2(56.744,48.87)
  Bottom Layer w0.381: J5.2 43.336,50.644 44.986,48.994 v2(47.242,48.994) ; v2(56.744,48.87) 77.539,48.87 ; P3.1 71.196,31.648 76.098,36.551 76.098,47.429 77.539,48.87 ; SW1.1 78.901,68.851 80.569,67.183 80.569,51.9 77.539,48.87
KEY2: P3.2 SW2.1 | length 39.7
  Bottom Layer w0.381: P3.2 73.736,33.223 76.632,36.119 76.632,47.066 81.686,52.121 81.686,62.611 82.927,63.851 SW2.1
M10: P2.4 U3.2 | length 46.3
  Bottom Layer w0.381: P2.4 52.857,33.757 51.816,34.798 51.816,47.422 55.143,50.749 76.81,50.749 77.902,51.841 U3.2@77.902,52.908
NetC2_2: C2.2 DISP1.2 | length 4.1
  Bottom Layer w0.381: DISP1.2 41.461,58.335 42.418,57.379 C2.2@43.256,57.379
NetD1_A: D1.A R4.1 | length 12.1
  Bottom Layer w0.381: D1.A 68.072,66.065 68.402,66.396 73.406,66.396 74.752,65.049 75.692,65.049 R4.1
NetD2_A: D2.A R5.1 | length 5.3
  Bottom Layer w0.381: D2.A 36.754,66.065 R5.1
NetD3_A: D3.A R6.1 | length 4.9
  Bottom Layer w0.381: D3.A 56.591,66.065 R6.1
NetD4_A: D4.A R7.1 | length 5.1
  Bottom Layer w0.381: D4.A 46.672,66.065 R7.1
NetD6_1: D6.1 L1.2 U5.1 | length 5.1
  Bottom Layer w0.381: D6.1@54.063,57.023 55.905,57.023 55.982,57.099 L1.2@56.03,57.051 ; L1.2@56.03,56.134 L1.2@56.03,57.051 ; U5.1 56.03,59.049 L1.2@56.03,57.051
NetDISP1_7: DISP1.7 R1.2 | length 3.7
  Bottom Layer w0.381: DISP1.7 R1.2@43.213,61.435
NetJ10_1: J10.1 U5.4 | length 2.1
  Bottom Layer w0.381: U5.4 59.959,61.072 60.296,60.735 J10.1
NetR2_1: R2.1 R3.2 U5.3 | length 4
  Bottom Layer w0.381: R2.1@52.324,61.316 54.305,61.316 54.356,61.366 54.915,61.366 55.209,61.072 U5.3
NetR4_2: R4.2 U1.4 | length 2.3
  Bottom Layer w0.381: R4.2 77.912,66.319 U1.4
NetR5_2: R5.2 U2.4 | length 39
  Bottom Layer w0.381: R5.2 40.081,67.488 42.977,64.592 47.396,64.592 48.92,63.068 67.394,63.068 69.505,60.957 U2.4
NetR6_2: R6.2 U3.4 | length 28.7
  Bottom Layer w0.381: R6.2@59.919,67.92 59.919,67.056 62.763,64.211 68.402,64.211 70.002,65.811 73.203,65.811 77.252,61.762 U3.4@77.252,54.788
NetR7_2: R7.2 U4.4 | length 31.2
  Bottom Layer w0.381: R7.2@50.19,67.894 50.19,66.929 53.467,63.652 67.564,63.652 70.46,60.757 70.46,58.699 73.378,55.781 U4.4
ORST: DISP1.9 J11.1 J12.2 | length 6.6
  Bottom Layer w0.381: DISP1.9 42.57,62.675 42.938,63.043 43.533,63.043 J12.2 44.351,63.043 45.492,63.043 J11.1@45.956,63.043
OSC: P2.2 U2.2 | length 40.2
  Bottom Layer w0.381: P2.2 47.777,32.207 50.749,35.179 50.749,47.864 54.702,51.816 69.799,51.816 70.155,52.172 U2.2
PPS: P1.1 U1.2 | length 95.9
  Top Layer w0.381: v2(48.26,48.184) 48.311,48.133 54.661,48.133 v2(54.686,48.108)
  Bottom Layer w0.381: P1.1@18.898,27.403 21.027,27.403 23.114,29.489 24.587,29.489 25.629,28.448 28.245,28.448 29.032,29.235 29.032,32.36 27.381,34.011 27.381,43.256 32.309,48.184 v2(48.26,48.184) ; v2(54.686,48.108) 54.813,48.108 56.312,49.606 77.521,49.606 80.035,52.121 80.035,61.849 78.715,63.17 U1.2
S\S\: DISP1.8 P2.1 | length 50.3
  Bottom Layer w0.381: DISP1.8 37.036,62.055 35.408,60.427 35.408,55.644 37.838,53.213 43.282,53.213 46.584,49.911 48.209,49.911 50.216,47.904 50.216,35.535 45.237,30.556 P2.1
SCK/SCL: DISP1.11 P1.3 | length 46.1
  Top Layer w0.381: v2(25.324,33.858) 25.324,33.731 25.654,33.401 25.654,27.508 25.502,27.356 v2(25.654,27.356)
  Bottom Layer w0.381: P1.3@23.978,27.403 24.024,27.356 v2(25.654,27.356) ; v2(25.324,33.858) 25.146,34.036 25.146,44.061 34.163,53.078 34.163,60.978 37.092,63.906 39.514,63.906 DISP1.11
SDI/SDA: J3.2 J4.1 J12.1 P1.2 | length 46.7
  Top Layer w0.381: v2(22.657,33.122) 22.733,33.122 25.527,35.916 v2(25.806,35.916) ; v2(36.576,51.867) 40.183,55.474 40.183,61.519 v2(42.494,63.83)
  Bottom Layer w0.381: P1.2 21.819,32.283 v2(22.657,33.122) ; v2(25.806,35.916) 25.806,43.967 32.639,50.8 34.77,50.8 J4.1 35.588,50.8 36.627,50.8 ; v2(36.576,51.867) 36.627,51.816 36.627,50.8 ; J3.2 37.909,50.8 37.509,50.8 36.627,50.8 ; v2(42.494,63.83) 42.621,63.703 43.458,63.703 43.485,63.703
SDO: DISP1.12 J4.2 P1.4 | length 46.5
  Top Layer w0.381: v2(32.487,52.375) 35.154,52.375 v2(35.179,52.349)
  Bottom Layer w0.381: P1.4 26.826,30.658 26.111,30.658 24.613,32.156 24.613,44.282 33.63,53.299 33.63,61.199 36.966,64.535 DISP1.12 ; J4.2 35.179,51.74 v2(35.179,52.349)
USB_N: J2.2 P4.2 | length 9.6
  Top Layer w0.381: P4.2 88.138,94.158 88.824,93.472 88.824,92.853 89.551,92.126 94.417,92.126 95.113,92.822 J2.2
USB_P: J2.3 P4.3 | length 8.5
  Top Layer w0.381: P4.3 90.145,94.158 89.459,93.472 89.459,93.116 89.814,92.761 94.154,92.761 94.865,93.472 J2.3
USBGND: J2.5 J2.6 J2.7 J2.8 J2.9 P4.4 | length 16.9
  Top Layer w0.381: P4.4 93.553,94.772 J2.5 95.979,96.447 96.204,96.672 98.554,96.672 98.654,96.772 J2.8 J2.7 98.654,90.172 96.304,90.172 J2.6@96.204,90.272
VPP: C1.2 D6.2 DISP1.1 R2.2 | length 21.9
  Bottom Layer w0.381: DISP1.1 40.583,57.715 42.088,56.21 45.773,56.21 47.295,57.732 47.295,59.665 48.514,60.884 49.555,60.884 49.721,60.719 51.448,60.719 R2.2 ; C1.2 49.835,60.477 52.363,57.949 D6.2@52.363,57.023
VUSB: J2.1 P4.1 | length 12
  Top Layer w0.203: P4.1 87.935,91.542 95.348,91.542 J2.1
pads on no net: C3.0 D1.3 D2.3 D3.3 D4.3 D6.0 DRL1.0 DRL1.D2m7 DRL2.0 DRL2.D2m7 DRL3.0 DRL3.D2m7 DRL4.0 DRL4.D2m7 DRL10.0 DRL10.D2m7 DRL40.0 DRL40.D2m7 J2.4 U1.0 U1.1 U2.0 U2.1 U3.0 U3.1 U4.0 U4.1

## Polygon pours and split planes (outlines as drawn)
GND on Bottom Layer "Top Layer-No Net" (solid, remove dead copper, pour order 5): 33.833,70.714 88.621,70.714 88.621,64.287 94.107,64.287 94.107,52.426 94.107,31.572 91.059,31.572 91.059,26.238 90.449,25.629 10.135,25.629 10.135,52.426 31.242,52.426 32.715,53.899 32.715,70.714
GND on Top Layer "Top Layer-No Net" (solid, remove dead copper, pour order 4): 33.833,70.714 88.621,70.714 88.621,64.287 94.107,64.287 94.107,52.426 94.107,31.572 91.059,31.572 91.059,26.238 90.449,25.629 10.135,25.629 10.135,52.426 31.242,52.426 32.715,53.899 32.715,70.714

## Keep-outs
Keep-Out Layer:
  circle w0.152: c87.579,39.751 r6.5
  circle w0.152: c61.62,39.757 r6.5
  circle w0.152: c9.703,39.757 r6.5
  circle w0.152: c35.662,39.757 r6.5
  lines w0.152: 9.489,8.941 9.489,14.271 cw(c10.273,14.271) 10.273,15.055 10.581,15.055 cw(c10.581,14.199) 11.437,14.199 11.437,10.5 cw(c11.43,10.5) 11.43,10.492 11.43,10.109 ccw(c12.7,10.109) 12.7,8.839 17.35,8.839 17.707,8.839 cw(c17.707,8.357) 18.19,8.357 18.19,8.114 cw(c17.757,8.114) 17.757,7.681 14.768,7.681 ccw(c14.768,7.671) 14.757,7.671 10.77,7.671 cw(c10.77,8.941) 9.5,8.941 ; 9.489,23.222 cw(c9.489,23.211) 9.5,23.211 9.5,17.805 ; 9.493,17.805 ccw(c10.211,17.805) 10.211,17.088 10.668,17.088 ccw(c10.668,17.85) 11.43,17.85 11.43,20.472 11.43,21.666 cw(c12.7,21.666) 12.7,22.936 14.199,22.936 16.617,22.936 ccw(c16.617,23.622) 17.302,23.622 ccw(c16.432,23.622) 16.432,24.492 10.77,24.492 ccw(c10.77,23.222) 9.5,23.222 ; 9.5,77.267 9.5,81.229 cw(c10.439,81.229) 10.439,82.169 11.371,82.169 ccw(c11.371,82.177) 11.379,82.177 11.486,82.177 cw(c11.486,81.352) 12.311,81.352 ccw(c12.311,81.349) 12.308,81.349 12.308,74.93 ; 9.5,77.71 9.5,73.819 ccw(c10.77,73.819) 10.77,72.549 ; 9.5,85.492 9.5,89.383 cw(c10.77,89.383) 10.77,90.653 17.112,90.653 ccw(c17.112,90.661) 17.12,90.661 cw(c17.12,90.249) 17.531,90.249 17.531,90.038 cw(c17.018,90.038) 17.018,89.525 ccw(c17.008,89.525) 17.008,89.535 15.088,89.535 13.589,89.535 ccw(c13.589,88.265) 12.319,88.265 12.319,87.071 cw(c12.319,87.061) 12.329,87.061 12.329,85.877 cw(c11.136,85.877) 11.136,84.684 10.338,84.684 cw(c10.338,85.522) 9.5,85.522 9.5,85.573 ; 10.77,72.538 18.161,72.538 ccw(c18.161,73.034) 18.657,73.034 18.657,73.198 ccw(c18.186,73.198) 18.186,73.669 cw(c18.166,73.669) 18.166,73.649 13.589,73.649 ; 12.319,74.93 ccw(c13.589,74.93) 13.589,73.66 ; 12.324,87.071 cw(c12.324,87.066) 12.329,87.066 ; 19.5,23.8 cw(c20.211,23.8) 20.211,24.511 37.955,24.511 cw(c37.955,23.749) 38.717,23.749 cw(c37.904,23.749) 37.904,22.936 20.265,22.936 cw(c20.265,23.687) 19.515,23.687 ; 21.082,89.525 38.585,89.525 ccw(c38.585,90.17) 39.23,90.17 ccw(c38.747,90.17) 38.747,90.653 38.684,90.653 ccw(c38.674,90.653) 38.674,90.663 21.057,90.663 ccw(c21.057,90.155) 20.549,90.155 20.549,90.068 ccw(c21.082,90.068) 21.082,89.535 ; 92.964,72.549 cw(c92.964,72.523) 92.989,72.523 ; 92.989,72.523 ccw(c92.973,72.523) 92.973,72.539 42.056,72.539 cw(c42.056,73.016) 41.58,73.016 41.58,73.66 41.58,89.535 41.58,89.764 cw(c42.469,89.764) 42.469,90.653 87.63,90.653 cw(c87.63,89.383) 88.9,89.383 88.9,83.251 ccw(c88.909,83.251) 88.909,83.242 94.463,83.242 94.463,67.113 92.989,67.113 92.989,72.523 ; 0,3.439 ccw(c3.439,3.439) 3.439,0 95.17,0 ccw(c95.17,4.83) 100,4.83 100,16.339 ccw(c98.73,16.339) 98.73,17.609 97.307,17.609 97.307,71.761 97.307,83.242 99.085,83.242 ccw(c99.085,84.157) 100,84.157 100,95.288 ccw(c95.288,95.288) 95.288,100 3.423,100 ccw(c3.423,96.577) 0,96.577 0,3.439 ; 2.845,23.4 2.845,29.947 4.318,29.947 4.318,24.517 7.366,24.517 7.366,23.4 2.845,23.4 ; 2.845,67.113 2.845,73.66 7.366,73.66 7.366,72.542 4.318,72.542 4.318,67.113 2.845,67.113 ; 9.03,54.229 ccw(c9.645,54.229) 9.645,53.615 31.598,53.615 ccw(c31.598,54.359) 32.343,54.359 32.343,68.148 ccw(c31.555,68.148) 31.555,68.936 12.344,68.936 9.941,68.936 ccw(c9.941,68.025) 9.03,68.025 9.03,54.229 ; 20,8.126 ccw(c20.442,8.126) 20.442,7.684 38.024,7.684 ccw(c38.024,8.331) 38.671,8.331 ccw(c38.189,8.331) 38.189,8.814 28.372,8.814 ccw(c28.362,8.814) 28.362,8.824 20.498,8.824 ccw(c20.498,8.326) 20,8.326 20,8.126 ; 21.084,73.088 ccw(c21.628,73.088) 21.628,72.545 39.329,72.545 ccw(c39.329,72.942) 39.727,72.942 39.727,73.312 ccw(c39.375,73.312) 39.375,73.663 ccw(c39.356,73.663) 39.356,73.683 21.603,73.683 ccw(c21.603,73.164) 21.084,73.164 21.084,73.088 ; 40.691,8.144 ccw(c41.173,8.144) 41.173,7.661 91.278,7.661 ccw(c91.278,7.671) 91.288,7.671 ccw(c91.288,8.941) 92.558,8.941 92.558,13.468 94.463,13.468 ccw(c94.463,13.473) 94.468,13.473 94.468,29.699 ccw(c94.214,29.699) 94.214,29.953 92.989,29.953 92.989,24.492 41.961,24.492 ccw(c41.961,23.222) 40.691,23.222 40.691,22.936 40.691,8.839 40.691,8.144

## Silkscreen, mask and mechanical layers (free items; w line width, h text height)
Top Overlay:
  drawing of 53 lines, arcs and shapes, not listed
Bottom Overlay:
  text "GPSDO Face V1.0 1819" at 32.36,51.079 h1.14
  text "www.CircuitValley.com" at 32.791,49.149 h1.14

## Text inside footprints (layer, text, board x,y; h text height)
C4: Bottom Overlay "+" at 84.028,61.271 h1.02 r90
C6: Bottom Overlay "+" at 91.242,61.271 h1.02 r90